# EAGLE board Road divider2 Final (EAGLE 7.6.0)
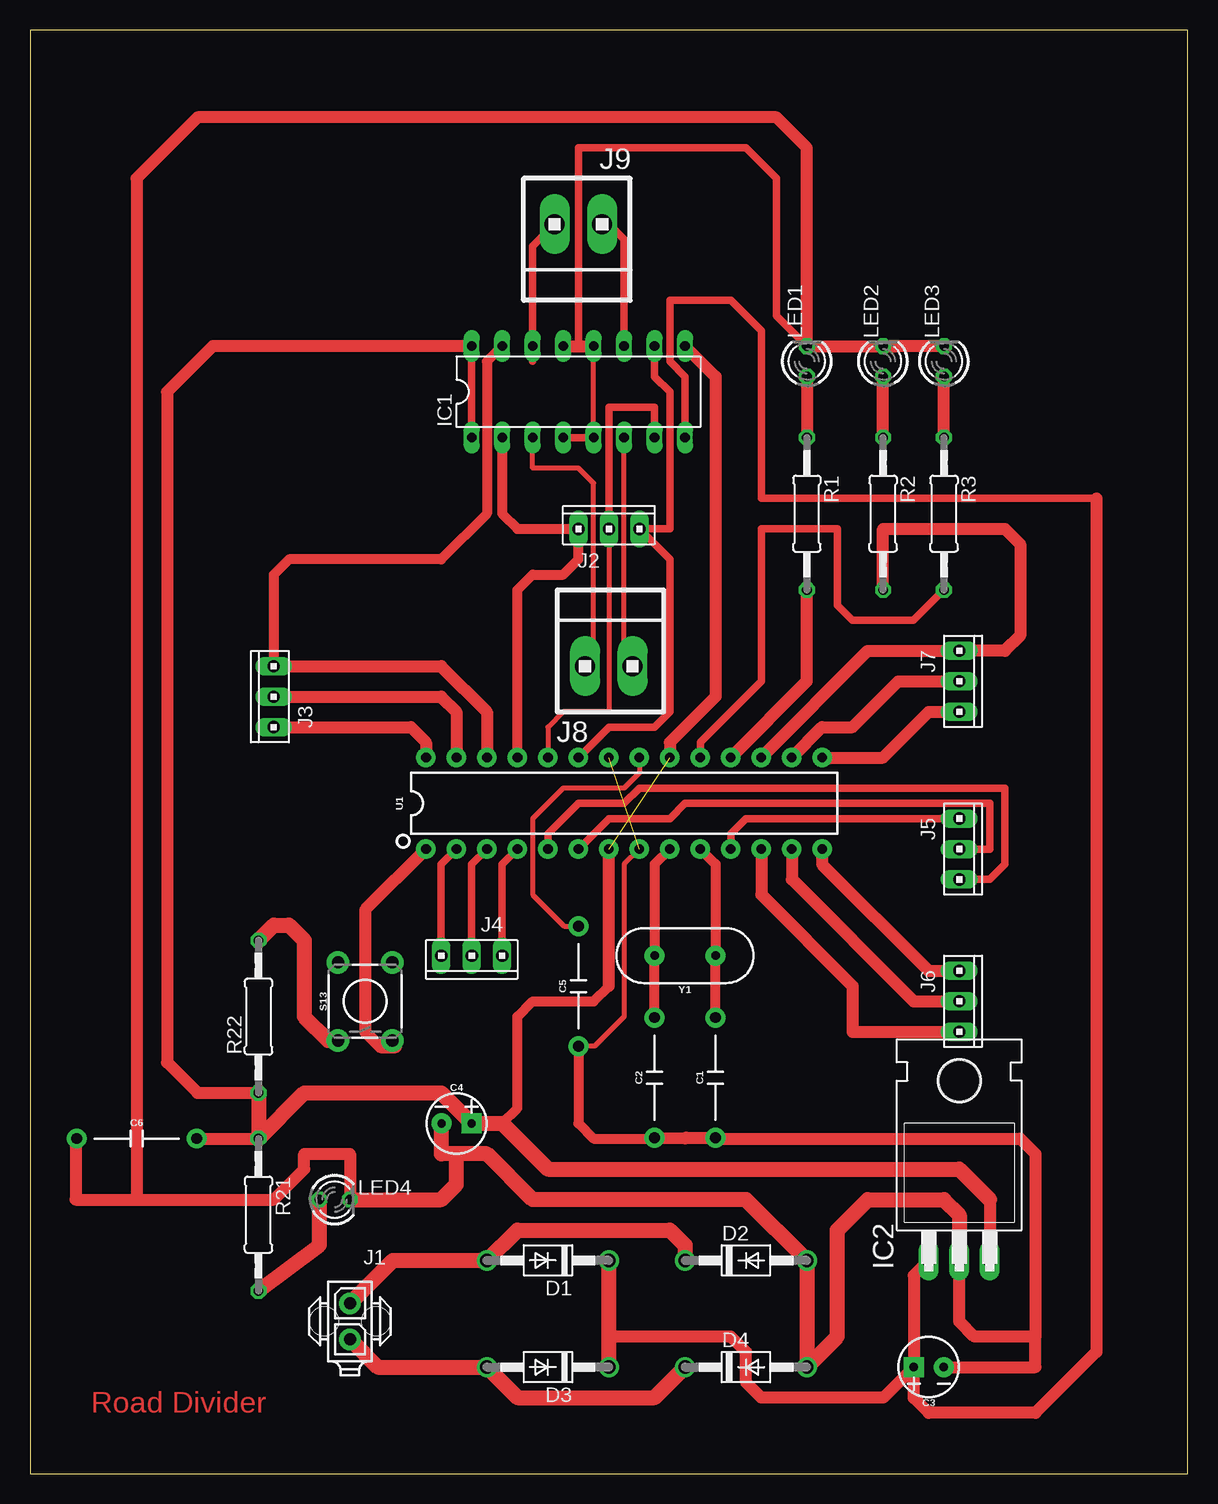
[diagram p0: board, top side]

Size 96.5 x 120.32 mm. Coordinates in mm from the lower left corner, seen from the top.
Outline: 0,0 96.5,0 96.5,120.32 0,120.32 0,0
Copper layers (1*16): Top 0.035mm / dielectric 1.5mm / Bottom 0.035mm
Design rules "default": minimum track width 10mil, minimum drill 24mil, track to track 8mil, track to pad 8mil, pad to pad 8mil, via to via 8mil, smd to smd 8mil, copper to edge 40mil, drill to drill 8mil, minimum pad ring 10mil, minimum via ring 8mil, stop-mask expansion 4mil, vias tented up to drill 0mil, thermal gap 10mil

## Footprints (pad centres in the part's own frame; a part is rotated, then mirrored left to right if it is on the bottom)
CAP-PTH-10MM = drill 0.9 pad 1.651: 1 -5,0; 2 5,0
CPOL-RADIAL-2.5MM-5MM-KIT = drill 0.7 pad 1.651 square: 1 1.25,0 | drill 0.7 pad 1.651: 2 -1.25,0
DO41-10 = drill 1.118: A 5.08,0; C -5.08,0
DIL16 = drill 0.813 long: 1 -8.89,-3.81; 2 -6.35,-3.81; 3 -3.81,-3.81; 4 -1.27,-3.81; 5 1.27,-3.81; 6 3.81,-3.81; 7 6.35,-3.81; 8 8.89,-3.81; 9 8.89,3.81; 10 6.35,3.81; 11 3.81,3.81; 12 1.27,3.81; 13 -1.27,3.81; 14 -3.81,3.81; 15 -6.35,3.81; 16 -8.89,3.81
TO220H = drill 1.118 long: 1 -2.54,-10.16; 2 0,-10.16; 3 2.54,-10.16 | hole 3.302: 0,4.826
794681-2 = drill 1 pad 1.778: 1 0,-1.5; 2 0,1.5 | hole 2.4: 2.13,0; -2.17,0
10X03MTA = drill 1.016 long: 1 2.54,0; 2 0,0; 3 -2.54,0
1X2MTA = drill 1.676 long: 1 1.981,0; 2 -1.981,0
LED3MM = drill 0.813 octagon: A -1.27,0; K 1.27,0
0207/12 = drill 0.813 octagon: 1 -6.35,0; 2 6.35,0
TACTILE_SWITCH_PTH_6.0MM_KIT = drill 1.016 pad 1.88: 1 -3.251,2.261; 2 3.251,2.261; 3 -3.251,-2.261; 4 3.251,-2.261
DIP28 = drill 0.813 pad 1.626: 1 -16.51,-3.81; 2 -13.97,-3.81; 3 -11.43,-3.81; 4 -8.89,-3.81; 5 -6.35,-3.81; 6 -3.81,-3.81; 7 -1.27,-3.81; 8 1.27,-3.81; 9 3.81,-3.81; 10 6.35,-3.81; 11 8.89,-3.81; 12 11.43,-3.81; 13 13.97,-3.81; 14 16.51,-3.81; 15 16.51,3.81; 16 13.97,3.81; 17 11.43,3.81; 18 8.89,3.81; 19 6.35,3.81; 20 3.81,3.81; 21 1.27,3.81; 22 -1.27,3.81; 23 -3.81,3.81; 24 -6.35,3.81; 25 -8.89,3.81; 26 -11.43,3.81; 27 -13.97,3.81; 28 -16.51,3.81
HC49US = drill 0.7 pad 1.651: 1 -2.54,0; 2 2.54,0

## Placement (x,y rotation side)
C1  10nF  [CAP-PTH-10MM]  57.15,33.02 90 top
C2  10nF  [CAP-PTH-10MM]  52.07,33.02 90 top
C3  10uF  [CPOL-RADIAL-2.5MM-5MM-KIT]  74.93,8.89 180 top
C4  10uF  [CPOL-RADIAL-2.5MM-5MM-KIT]  35.56,29.21 0 top
C5  10nF  [CAP-PTH-10MM]  45.72,40.64 90 top
C6  10nF  [CAP-PTH-10MM]  8.89,27.94 0 top
D1  1N4004  [DO41-10]  43.18,17.78 180 top
D2  1N4004  [DO41-10]  59.69,17.78 0 top
D3  1N4004  [DO41-10]  43.18,8.89 180 top
D4  1N4004  [DO41-10]  59.69,8.89 0 top
IC1  L293D  [DIL16]  45.72,90.17 0 top
IC2  7812T  [TO220H]  77.47,27.94 0 top
J1  794681-2  [794681-2]  26.67,12.7 180 top
J2  [10X03MTA]  48.26,78.74 0 top
J3  [10X03MTA]  20.32,64.77 90 top
J4  [10X03MTA]  36.83,43.18 180 top
J5  [10X03MTA]  77.47,52.07 270 top
J6  [10X03MTA]  77.47,39.37 270 top
J7  [10X03MTA]  77.47,66.04 270 top
J8  [1X2MTA]  48.26,67.31 0 top
J9  [1X2MTA]  45.72,104.14 180 top
LED1  TLLR4400  [LED3MM]  64.77,92.71 90 top
LED2  TLLR4400  [LED3MM]  71.12,92.71 90 top
LED3  TLLR4400  [LED3MM]  76.2,92.71 90 top
LED4  TLLR4400  [LED3MM]  25.4,22.86 0 top
R1  [0207/12]  64.77,80.01 270 top
R2  [0207/12]  71.12,80.01 270 top
R3  [0207/12]  76.2,80.01 270 top
R21  [0207/12]  19.05,21.59 270 top
R22  [0207/12]  19.05,38.1 90 top
S13  MOMENTARY-SWITCH-SPST-PTH-6.0MM-KIT  [TACTILE_SWITCH_PTH_6.0MM_KIT]  27.94,39.37 90 top
U1  328P  [DIP28]  49.53,55.88 0 top
Y1  16MHz  [HC49US]  54.61,43.18 180 top

## Library data of the parts
C1 C2 C5 C6 = SparkFun-Capacitors; PROD_ID: CAP-09321
C3 C4 = SparkFun-Capacitors; PROD_ID: CAP-08440
D1-D4 = diode
IC1 = st-microelectronics; MPN: L293D; OC_FARNELL: 9589619; OC_NEWARK: 56P8249
IC2 = linear
J1-J9 = con-amp
LED1-LED4 = led; MF: VISHAY SEMICONDUCTOR; OC_FARNELL: 1612437
R1-R3 R21 R22 = rcl
S13 = SparkFun-Switches; PROD_ID: SWCH-08441; SF_SKU: COM-00097
U1 = SparkFun-IC-Microcontroller; PROD_ID: IC-09136
Y1 = SparkFun-Clocks; PROD_ID: XTAL-08181; SF_ID: COM-00536

## Nets
5V: C4.1 C6.2 IC1.1 IC1.9 IC1.16 IC2.3 R21.1 R22.1 U1.7 U1.20
12V: C3.1 D1.C D3.C IC1.8 IC2.1
GND: C1.1 C2.1 C3.2 C4.2 C5.1 C6.1 D2.A D4.A IC1.4 IC1.5 IC1.12 IC1.13 IC2.2 LED1.K LED2.K LED3.K LED4.K U1.8 U1.22
N$1: C5.2 U1.21
N$2: D1.A D2.C J1.1
N$3: C2.2 U1.9 Y1.2
N$4: C1.2 U1.10 Y1.1
N$5: LED4.A R21.2
N$8: R22.2 S13.1
N$9: S13.3 U1.1
N$10: D3.A D4.C J1.2
N$13: IC1.2 J2.3 U1.25
N$14: IC1.7 J2.2 U1.24
N$15: IC1.10 J2.1 U1.23
N$16: IC1.15 J3.1 U1.26
N$17: J3.2 U1.27
N$18: J3.3 U1.28
N$19: J4.1 U1.2
N$20: J4.2 U1.3
N$21: J4.3 U1.4
N$22: J5.1 U1.5
N$23: J5.2 U1.6
N$24: J5.3 U1.11
N$25: J6.1 U1.12
N$26: J6.2 U1.13
N$27: J6.3 U1.14
N$28: J7.1 U1.15
N$29: J7.2 U1.16
N$30: J7.3 R2.2 U1.17
N$31: IC1.14 J9.1
N$32: IC1.3 J8.2
N$33: IC1.6 J8.1
N$34: IC1.11 J9.2
N$38: R1.2 U1.18
N$39: R3.2 U1.19
N$40: LED1.A R1.1
N$41: LED2.A R2.1
N$42: LED3.A R3.1

## Tracks (layer width: path | path; a pad name or v marks a point on that pad's centre or on a via)
5V  (1 unrouted)
  Top 0.61: IC1.1 IC1.16
  Top 0.813: 39.37,29.21 40.64,30.48 40.64,38.1 41.91,39.37 46.99,39.37 48.26,40.64
  Top 1.016: IC1.16 15.24,93.98 11.43,90.17 11.43,34.29 13.97,31.75 R22.1 | 80.01,22.86 IC2.3 | C6.2 R21.1 | 48.26,40.64 U1.7 | IC1.9 57.15,91.44 57.15,64.77 53.34,60.96 U1.20
  Top 1.27: 80.01,22.86 77.47,25.4 43.18,25.4 39.37,29.21 C4.1 36.81,29.23 34.29,31.75 22.86,31.75 R21.1 R22.1
12V
  Top 0.61: 73.66,6.35 73.68,6.37 C3.1 | IC1.8 54.61,91.44 53.34,92.71 53.34,97.79 58.42,97.79 60.96,95.25 60.96,81.28 88.9,81.28
  Top 1.016: 88.9,81.28 88.9,10.16 83.82,5.08 74.93,5.08 73.68,6.33 C3.1 | IC2.1 73.68,16.53 C3.1 | C3.1 71.14,6.35 60.96,6.35 59.69,7.62 59.69,10.16 58.42,11.43 48.26,11.43
  Top 1.27: D3.C 48.26,11.43 D1.C
GND  (1 unrouted)
  Top 0.406: IC1.5 IC1.12 | U1.8 49.53,50.8 49.53,38.1 47.07,35.64 C5.1
  Top 0.61: IC1.4 IC1.5 | LED1.K 62.23,96.52 62.23,107.95 59.69,110.49 45.72,110.49 45.72,93.98
  Top 0.813: C5.1 45.72,29.21 46.99,27.94 54.61,27.94 54.53,28.02 C2.1
  Top 1.016: 8.89,22.86 8.89,107.95 13.97,113.03 62.23,113.03 64.77,110.49 LED1.K LED2.K | 8.89,22.86 20.32,22.86 22.86,25.4 22.86,26.67 26.67,26.67 LED4.K | IC1.13 45.72,93.98 IC1.12 | 54.61,27.94 54.69,28.02 C1.1 57.23,27.94 82.55,27.94 83.82,26.67 83.82,11.43 | 83.82,11.43 78.74,11.43 77.47,12.7 IC2.2 | C3.2 83.82,8.89 83.82,11.43 | C6.1 3.81,27.94 3.81,22.86 8.89,22.86 | LED2.K 72.39,93.98 | LED3.K LED2.K
  Top 1.27: 35.56,26.67 38.1,26.67 41.91,22.86 59.69,22.86 D2.A D4.A 67.31,11.43 67.31,20.32 69.85,22.86 76.2,22.86 77.47,21.59 IC2.2 | 35.56,26.67 34.29,26.67 34.31,26.69 C4.2 | LED4.K 34.29,22.86 35.56,24.13 35.56,26.67
N$1
  Top 0.406: U1.21 50.8,58.42 49.53,57.15 44.45,57.15 41.91,54.61 41.91,48.26 44.53,45.64 C5.2
N$2
  Top 1.27: J1.1 30.25,17.78 D1.A 40.64,20.32 53.34,20.32 54.61,19.05 D2.C
N$3
  Top 0.813: C2.2 Y1.2 52.07,50.8 U1.9
N$4
  Top 0.813: C1.2 Y1.1 57.15,50.8 U1.10
N$5
  Top 1.27: R21.2 24.13,19.05 LED4.A
N$8
  Top 1.27: R22.2 20.32,45.72 21.59,45.72 22.86,44.45 22.86,38.1 24.84,36.12 S13.1
N$9
  Top 1.016: U1.1 27.94,46.99 27.94,36.83 29.21,35.56 30.48,35.56 30.2,35.84 S13.3
N$10
  Top 1.27: J1.2 28.98,8.89 D3.A 40.64,6.35 52.07,6.35 D4.C
N$13
  Top 0.813: IC1.2 39.37,80.01 40.64,78.74 J2.3 45.72,76.2 44.45,74.93 41.91,74.93 40.64,73.66 U1.25
N$14
  Top 0.406: J2.2 48.26,63.5 44.45,63.5 43.18,62.23 U1.24
  Top 0.61: IC1.7 52.07,88.9 48.26,88.9 J2.2
N$15
  Top 0.406: 53.34,88.9 53.34,78.74
  Top 0.61: IC1.10 52.07,91.44 53.34,90.17 53.34,78.74 J2.1 53.34,76.2 53.34,63.5 52.07,62.23 48.26,62.23 U1.23
N$16
  Top 0.813: IC1.15 38.1,92.71 38.1,80.01 34.29,76.2 21.59,76.2 20.32,74.93 J3.1
  Top 1.016: J3.1 34.29,67.31 38.1,63.5 U1.26
N$17
  Top 1.016: J3.2 34.29,64.77 35.56,63.5 U1.27
N$18
  Top 1.016: J3.3 31.75,62.23 33.02,60.96 U1.28
N$19
  Top 0.61: U1.2 34.29,50.8 J4.1
N$20
  Top 0.61: U1.3 36.83,50.8 J4.2
N$21
  Top 0.61: U1.4 39.37,50.8 J4.3
N$22
  Top 0.61: J5.1 80.01,49.53 81.28,50.8 81.28,57.15 50.8,57.15 49.53,55.88 45.72,55.88 43.18,53.34 U1.5
N$23
  Top 0.406: 78.74,52.07 J5.2
  Top 0.61: J5.2 80.01,52.07 80.01,55.88 54.61,55.88 53.34,54.61 48.26,54.61 U1.6
N$24
  Top 0.61: U1.11 58.42,53.34 59.69,54.61 J5.3
N$25
  Top 1.016: U1.12 60.96,48.26 68.58,40.64 68.58,36.83 J6.1
N$26
  Top 1.016: U1.13 63.5,49.53 73.66,39.37 J6.2
N$27
  Top 1.016: U1.14 66.04,50.8 74.93,41.91 J6.3
N$28
  Top 1.016: U1.15 71.12,59.69 74.93,63.5 J7.1
N$29
  Top 1.016: U1.16 66.04,62.23 68.58,62.23 72.39,66.04 J7.2
N$30
  Top 1.016: R2.2 71.12,78.74 81.28,78.74 82.55,77.47 82.55,69.85 81.28,68.58 J7.3 69.85,68.58 U1.17
N$31
  Top 0.61: J9.1 41.91,102.31 IC1.14 41.91,92.71
N$32
  Top 0.406: J8.2 46.99,68.02 46.99,82.55 45.72,83.82 41.91,83.82 IC1.3
N$33
  Top 0.406: J8.1 49.53,68.02 IC1.6
N$34
  Top 0.61: IC1.11 49.53,102.87 48.26,104.14 J9.2
N$38
  Top 1.016: U1.18 64.77,66.04 R1.2
N$39
  Top 0.61: R3.2 73.66,71.12 68.58,71.12 67.31,72.39 67.31,78.74 60.96,78.74 60.96,66.04 55.88,60.96 U1.19
N$40
  Top 1.016: LED1.A R1.1
N$41
  Top 1.016: R2.1 LED2.A
N$42
  Top 1.016: R3.1 LED3.A

## Text on the board
Top: Road Divider